# Altium PCB 5602_PCB_SHEET.PcbDoc (part 2 of 2)
Units mm, origin at the board's own origin, x right, y up, seen from the top; angles counter-clockwise.
Board outline 104.86 x 35.66 mm, 2 copper layers (Top Layer, Bottom Layer); 111 components, 84 nets, 367 pads, 137 vias.
Unrouted connection lines stored in the file: 5.
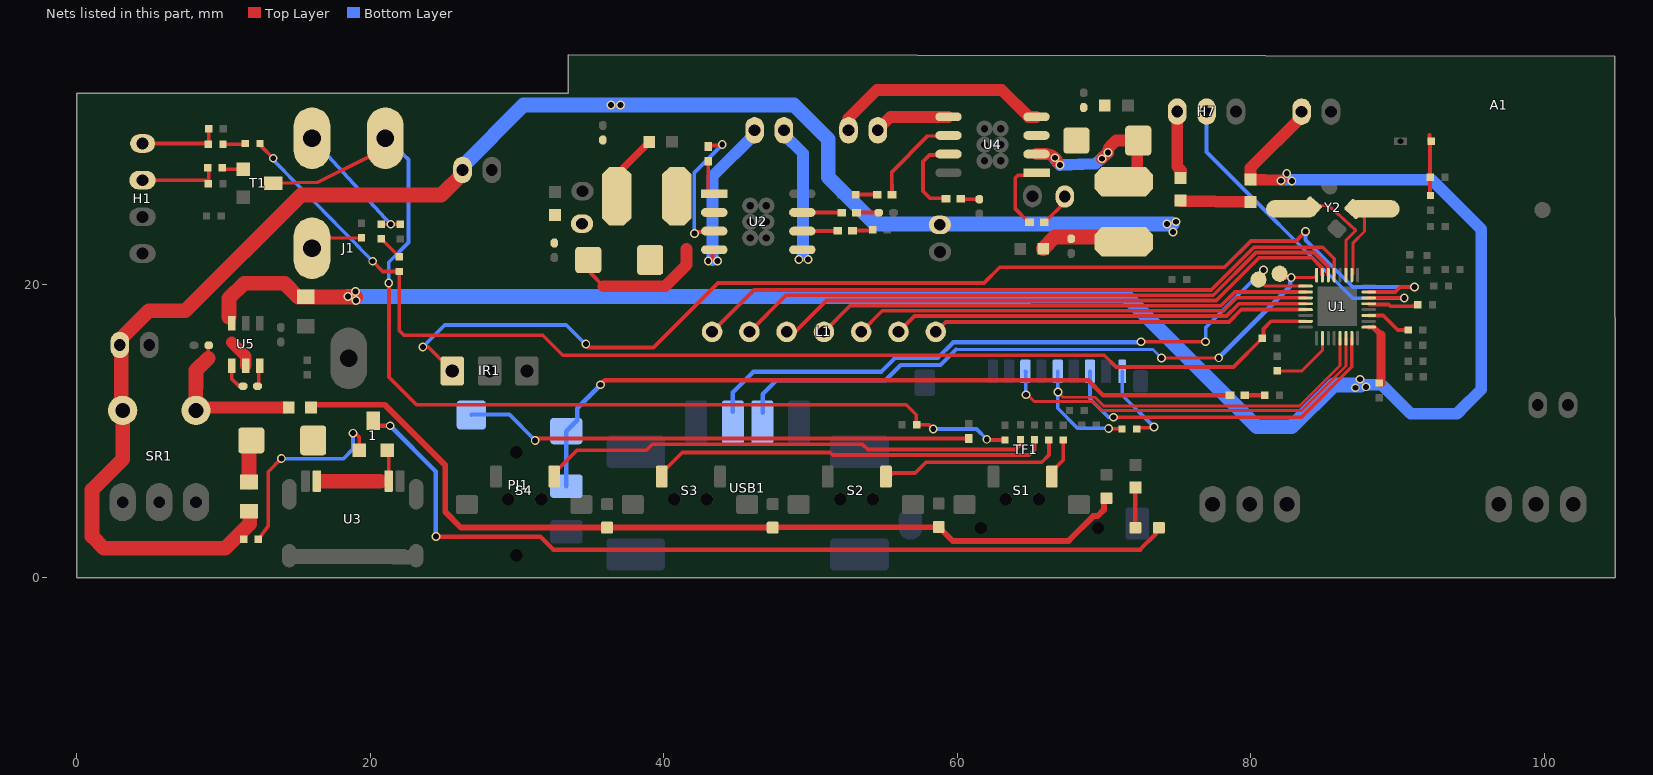
[diagram p2: the nets of this part, all layers, seen from the top]

## Via types
v1: diameter 0.6, hole 0.4, Top Layer to Bottom Layer, tented both sides, 131 vias
v2: diameter 0.4, hole 0.3, Top Layer to Bottom Layer, tented both sides, 6 vias

## Nets (pads, with @x,y where several pads share a name; then routed paths per layer and width w, separated by ;. In a path a pad name is that pad's centre, name@x,y a point inside that pad or via, vN(x,y) a via of type N, cw(c..) or ccw(c..) an arc to the next point about the centre after c; other vN are vias at no path point) (continued)
IR: IR1.1 U1.15 | length 80.2
  Top Layer w0.254: v1(23.595,15.73) 23.97,15.73 24.772,14.928 24.933,14.928 25.6,14.26 IR1.1@25.6,14.1 ; v1@34.622,15.962 34.887,15.698 39.315,15.698 43.708,20.091 61.838,20.091 62.913,21.165 78.23,21.165 80.017,22.953 83.093,22.953 v1(83.743,23.603) ; U1.15@88.044,19.482 89.854,19.482 90.192,19.821 v1(91.171,19.821)
  Bottom Layer w0.254: v1(23.595,15.73) 25.094,17.229 33.375,17.229 v1@34.752,15.852 ; v1(83.743,23.603) 83.743,23.034 86.956,19.821 v1(91.171,19.821)
  other v1: 34.703,15.944
LED1: L1.1 U1.21 | length 46.2
  Top Layer w0.254: L1.1@43.307,16.764 46.158,19.615 77.31,19.615 80.222,22.527 84.912,22.527 85.693,21.745 U1.21@85.693,20.632
LED2: L1.2 U1.22 | length 42.7
  Top Layer w0.254: L1.2@45.847,16.764 48.344,19.261 77.457,19.261 80.368,22.173 84.316,22.173 85.267,21.222 85.267,20.659 U1.22@85.294,20.632
LED3: L1.3 U1.23 | length 39.4
  Top Layer w0.254: L1.3@48.387,16.764 48.953,16.764 51.096,18.907 77.651,18.907 80.563,21.819 84.17,21.819 84.867,21.122 84.867,20.659 U1.23@84.894,20.632
LED4: L1.4 U1.26 | length 33.9
  Top Layer w0.254: L1.4@50.927,16.764 52.716,18.553 78.003,18.553 78.932,19.482 U1.26@83.744,19.482
LED5: L1.5 U1.27 | length 31.8
  Top Layer w0.2: L1.5@53.467,16.764 L1.5@54.021,16.764
  Top Layer w0.254: L1.5@53.467,16.764 54.902,18.199 78.15,18.199 79.033,19.082 U1.27@83.744,19.082
LED6: L1.6 U1.28 | length 28.5
  Top Layer w0.254: L1.6@56.007,16.764 57.088,17.845 78.366,17.845 79.203,18.682 U1.28@83.744,18.682
LED7: L1.7 U1.29 | length 25.8
  Top Layer w0.254: L1.7@58.547,16.764 59.22,17.437 78.521,17.437 79.367,18.282 U1.29@83.744,18.282
LED_SPI: H7.2 U1.14 | length 22.8
  Top Layer w0.254: U1.14@88.044,19.082 v1(90.47,19.082)
  Bottom Layer w0.254: H7.2@77.001,31.773 77.001,29.02 86.962,19.059 90.447,19.059 v1(90.47,19.082)
MIC: C11.2 R1.1 R5.1 U1.31 | length 81.7
  Top Layer w0.254: R5.1@12.5,29.6 ccw(c12.745,29.6) 12.572,29.427 v1(13.4,28.598) ; v1(20.177,21.576) 20.871,20.881 R1.1@21.994,20.881 21.994,16.854 22.318,16.529 31.771,16.529 33.128,15.172 70.022,15.172 70.83,14.364 78.829,14.364 C11.2@80.8,16.335 80.88,16.416 80.88,16.966 81.397,17.482 U1.31@83.744,17.482
  Bottom Layer w0.254: v1@13.408,28.59 13.379,28.59 13.335,28.547 13.341,28.541 v1@20.177,21.578
MUTE: R8.1 U1.13 | length 3.4
  Top Layer w0.254: U1.13@88.044,18.682 88.09,18.636 89.419,18.636 89.539,18.517 91.084,18.517 91.259,18.691 R8.1@91.293,18.691
Net1_1: 1.1 R27.2 | length 13.8
  Top Layer w0.254: R27.2@12.391,2.63 13.06,3.526 13.06,7.239 v1(13.954,8.132) ; v1@18.822,9.885 v1(18.843,9.863) 18.997,9.863 19.266,9.594 1.1@19.266,8.686
  Bottom Layer w0.254: v1(13.954,8.132) 13.97,8.116 18.185,8.116 18.843,8.775 v1(18.843,9.863)
Net1_2: 1.2 D3.2 U3.2 U3.3 | length 6.5
  Top Layer w0.254: D3.2@16.126,9.366 D3.2@16.37,9.122 ; 1.2@21.171,8.686 21.27,8.587 U3.3@21.27,6.595
  Top Layer w1: 16.694,6.595 20.694,6.595
Net1_3: 1.3 D1.1 | length 60.5
  Top Layer w0.254: 1.3@20.219,10.718 20.219,10.696 1.3@20.549,10.365
  Top Layer w0.3: 1.3@20.549,10.365 v1(21.371,10.365) ; v1(24.484,2.816) 31.595,2.816 32.481,1.93 72.468,1.93 73.552,3.014 73.552,3.218 D1.1@73.749,3.415
  Bottom Layer w0.3: v1(21.371,10.365) 24.484,7.252 v1(24.484,2.816)
NetA1_1: A1.1 C26.2 R34.2 | length 4
  Top Layer w0.254: A1.1@92.185,29.755 92.185,30.195 ; R34.2@92.216,26.053 A1.1@92.216,29.622
NetBR1_1: BR1.1 D2.2 U2.2 | length 1.2
  Top Layer w0.254: BR1.1@40.9,24.768 BR1.1@40.9,26.01
NetBR2_1: BR2.1 D4.2 U4.2 | length 12.2
  Top Layer w0.8: U4.2@65.415,28.879 66.051,28.879 cw(c66.051,28.014) v1(66.663,28.626) ; v1(66.663,28.626) 66.746,28.543 cw(c66.543,28.339) v1@66.83,28.339 ; v1(69.871,28.563) 70.284,28.976 v1(70.284,28.984) cw(c70.955,28.984) 70.48,29.459 70.789,29.767 cw(c70.865,29.691) 70.865,29.799 D4.2@72.344,29.799 72.268,29.723 72.268,27.868 71.395,26.995 BR2.1@71.358,26.995
  Bottom Layer w0.8: v1(66.663,28.626) ccw(c66.989,28.626) 66.758,28.395 v1(67.014,28.139) 69.444,28.215 69.849,28.586 v1(70.284,28.984)
NetC1_1: C1.1 R1.2 | length 1.7
  Top Layer w0.254: C1.1@20.756,23.103 R1.2@21.994,21.881
NetC1_2: C1.2 J1.1 R2.1 | length 9.3
  Top Layer w0.254: C1.2@20.756,24.103 20.873,24.103 21.406,24.101 R2.1@22.064,24.098
  Bottom Layer w0.254: J1.1@16.044,29.961 v1(21.406,24.095)
NetC2_2: C2.2 C3.2 H1.1 | length 5.5
  Top Layer w0.254: H1.1@4.5,29.6 8.87,29.6 cw(c8.87,29.45) C3.2@8.976,29.556 ccw(c8.918,29.614) 9,29.614 C2.2@9,30.6
NetC3_1: C3.1 R5.2 | length 1.6
  Top Layer w0.254: C3.1@9.976,29.556 11.5,29.556 R5.2@11.5,29.6
NetC4_2: C4.2 H1.2 R7.2 | length 5.6
  Top Layer w0.254: H1.2@4.5,27.1 C4.2@9,27.1 ; C4.2@8.976,26.856 ccw(c8.918,26.914) 9,26.914 C4.2@9,27.1 ; 9,27.108 C4.2@9,27.1 ; R7.2@9,27.9 C4.2@9,27.1
NetC6_1: C6.1 U1.2 | length 4.5
  Top Layer w0.2: C6.1@81.805,14.102 83.486,14.102 84.894,15.509 U1.2@84.894,16.332
NetC8_2: C8.2 R10.2 | length 1.4
  Top Layer w0.3: R10.2@79.597,12.442 C8.2@80.97,12.441
NetC10_2: C10.2 U1.11 | length 3.1
  Top Layer w0.254: U1.11@88.044,17.882 89.032,17.882 90.021,16.894 C10.2@90.73,16.894
NetC15_1: C15.1 R23.1 | length 1.3
  Top Layer w0.254: R23.1@53.136,24.891 53.148,24.902 54.45,24.902 C15.1@54.461,24.913
NetC16_1: C16.1 R25.1 | length 1.4
  Top Layer w0.254: R25.1@52.864,23.641 52.902,23.679 54.212,23.679 C16.1@54.25,23.717
NetC20_1: C20.1 R29.1 | length 1.3
  Top Layer w0.254: R29.1@60.255,25.833 R29.1@60.251,25.828 60.251,25.805 C20.1@61.512,25.805
NetC21_1: C21.1 R32.1 | length 1.5
  Top Layer w0.254: C21.1@53.083,26.1 53.083,26.117 R32.1@54.558,26.117
NetC24_1: C24.1 U5.4 | length 1.6
  Top Layer w0.254: U5.4@10.581,14.461 10.581,13.562 C24.1@11.062,13.082
NetC24_2: C24.2 U5.6 | length 1.5
  Top Layer w0.254: C24.2@12.336,13.068 12.409,13.141 12.409,14.389 U5.6@12.481,14.461
NetCAP1_2: CAP1.2 CAP2.2 CAP3.2 D2.1 R22.1 U2.3 | length 18
  Top Layer w0.254: 35.051,20.739 35.902,19.869 ; v1@42.098,23.369 v1(42.098,23.463) 42.192,23.463 42.293,23.564 43.39,23.564 U2.3@43.456,23.63 ; R22.1@43.049,29.388 43.122,29.461 43.93,29.461 v1(43.997,29.527)
  Top Layer w0.8: 35.902,19.869 40.1,19.869 41.567,21.335 41.567,22.419
  Bottom Layer w0.254: v1(42.098,23.463) 42.098,27.626 v1@44.007,29.535
NetCAP5_2: CAP5.2 CAP6.2 CAP7.2 D4.1 R28.1 U4.3 | length 3.2
  Top Layer w0.254: R28.1@65.933,24.235 65.978,24.235 67.343,25.601 CAP5.2@67.343,25.985 ; D4.1@67.523,29.193 D4.1@68.129,29.799
NetD1_2: D1.2 R21.2 | length 2.8
  Top Layer w0.254: R21.2@72.077,6.155 R21.2@72.148,6.083
  Top Layer w0.3: D1.2@72.148,3.415 R21.2@72.148,6.083
NetD3_1: D3.1 R26.2 | length 2.9
  Top Layer w0.254: D3.1@11.75,9.207 D3.1@11.91,9.366
  Top Layer w1: R26.2@11.75,6.534 D3.1@11.75,9.207
NetD5_1: D5.1 D6.1 D7.1 D8.1 R33.1 | length 61.6
  Top Layer w0.254: 67.582,2.521 67.655,2.594 ; D8.1@70,5.248 D8.1@70.181,5.429
  Top Layer w0.4: R33.1@15.982,11.602 16.179,11.799 20.995,11.799 25.121,7.673 25.121,4.501 26.196,3.425 D5.1@36.153,3.425 D6.1@47.436,3.425 47.46,3.449 58.729,3.449 D7.1@58.752,3.472 59.703,2.521 61.964,2.521 67.582,2.521 ; 67.655,2.594 69.267,4.206 69.568,4.206 70,4.639 D8.1@70,5.248
Neth2_1: h2.1 U2.4 | length 10.8
  Top Layer w0.254: v1@43.335,21.668 43.335,22.24 U2.4@43.456,22.36
  Bottom Layer w0.8: v1@43.335,21.668 43.335,27.37 46.2,30.235 h2.1@46.2,30.5
  other v1: 43.046,21.592 43.664,21.592
Neth2_2: h2.2 U2.5 | length 9.1
  Bottom Layer w0.8: h2.2@48.2,30.5 48.2,30.235 49.499,28.936 49.499,21.951
  other v1: 49.216,21.703 49.853,21.689
Neth3_1: h3.1 U4.4 | length 15.2
  Top Layer w0.8: h3.1@52.6,30.5 52.6,31.321 54.524,33.245 63.04,33.245 64.873,31.412 65.402,31.412 U4.4@65.4,31.41
Neth3_2: h3.2 U4.5 | length 5.2
  Top Layer w0.8: h3.2@54.6,30.5 54.6,30.554 55.463,31.417 55.471,31.41 U4.5@59.4,31.41
NetH7_3: H7.3 R39.1 | length 4.7
  Top Layer w0.254: 75.001,27.773 ccw(c75.746,27.773) R39.1@75.219,27.247
  Top Layer w0.8: H7.3@75.001,31.773 75.001,28.017 75.276,27.742
NetJ1_3: J1.3 R4.2 | length 3.6
  Top Layer w0.254: J1.3@16.044,22.461 17.099,23.15 R4.2@19.418,23.171
NetPJ1_1: PJ1.1 PJ1.2 R10.1 | length 51.3
  Top Layer w0.3: v1@35.702,13.165 35.997,13.46 68.928,13.46 69.946,12.442 R10.1@78.597,12.442
  Bottom Layer w0.3: PJ1.1@33.373,6.251 PJ1.2@33.373,10.001 34.121,10.749 34.121,11.568 v1(35.71,13.157)
NetPJ1_3: PJ1.3 R12.1 | length 34.8
  Top Layer w0.254: v1(31.25,9.372) 31.379,9.501 47.013,9.501 60.807,9.501 R12.1@60.869,9.439
  Bottom Layer w0.254: PJ1.3@26.9,11.1 26.9,11.128 29.493,11.128 v1(31.25,9.372)
NetR7_1: R7.1 T1.1 | length 1.4
  Top Layer w0.254: R7.1@10,27.9 10,27.852 T1.1@11.367,27.852
NetR14_2: R14.2 S1.1 | length 2.8
  Top Layer w0.254: S1.1@66.45,6.9 66.45,7.25 67.238,8.038 R14.2@67.238,9.393
NetR15_1: R15.1 S2.1 | length 13.1
  Top Layer w0.254: S2.1@55.15,6.9 55.15,6.662 55.63,7.141 57.15,7.141 57.885,7.877 65.765,7.877 66.255,8.367 R15.1@66.255,9.399
NetR18_1: R18.1 S3.2 | length 26.9
  Top Layer w0.254: S3.2@39.895,7.16 41.276,8.541 51.361,8.541 51.535,8.367 64.91,8.367 65.278,8.735 R18.1@65.278,9.415
NetR19_1: R19.1 S4.1 | length 33.5
  Top Layer w0.254: S4.1@32.55,6.9 32.55,7.15 34.097,8.697 38.829,8.697 39.231,9.099 53.56,9.099 53.908,8.751 63.998,8.751 64.317,9.069 R19.1@64.317,9.428
NetR22_2: R22.2 U2.1 | length 3.1
  Top Layer w0.254: U2.1@42.765,26.343 42.938,26.17 U2.1@43.222,26.17 ; R22.2@43.049,28.388 43.049,26.343 U2.1@43.222,26.17 ; U2.1@43.456,26.17 U2.1@43.222,26.17
NetR23_2: R23.2 U2.7 | length 2.7
  Top Layer w0.254: U2.7@49.456,24.9 49.46,24.896 52.132,24.896 R23.2@52.136,24.891
NetR25_2: R25.2 U2.6 | length 2.4
  Top Layer w0.254: U2.6@49.456,23.63 49.461,23.636 51.858,23.636 R25.2@51.864,23.641
NetR28_2: R28.2 U4.1 | length 5
  Top Layer w0.254: R28.2@64.932,24.235 64.887,24.235 63.955,25.168 63.955,27.235 64.156,27.436 65.242,27.436 U4.1@65.415,27.609
NetR29_2: R29.2 U4.7 | length 5.7
  Top Layer w0.254: R29.2@59.251,25.828 59.219,25.861 58.163,25.861 57.683,26.341 57.683,28.382 58.119,28.819 59.349,28.819 U4.7@59.4,28.87
NetR32_2: R32.2 U4.6 | length 6.4
  Top Layer w0.254: R32.2@55.558,26.117 55.555,27.657 57.988,30.102 U4.6@59.415,30.149
NetR38_1: R38.1 R39.2 | length 4.8
  Top Layer w0.8: R39.2@75.219,25.69 R38.1@79.988,25.619
PWR: BR1.2 BR2.2 C12.2 C13.2 C17.2 C18.2 CAP4.1 h4.1 h5.1 R26.1 R27.1 SR1.1 | length 121.3
  Top Layer w0.254: BR1.2@36.8,26.01 37.247,26.457 BR1.2@37.247,27.932 ; C12.2@38.855,29.862 C12.2@39.016,29.701 C12.2@39.053,29.737 ; BR2.2@71.017,23.236 71.019,23.233 BR2.2@71.358,22.895
  Top Layer w0.5: BR1.2@37.247,27.932 C12.2@39.016,29.701
  Top Layer w1: R26.1@11.794,4.534 11.794,3.683 10.136,2.025 1.858,2.025 1.058,2.824 1.058,6.016 3.14,8.097 SR1.1@3.14,11.412 3.047,11.505 3.047,15.782 h5.1@2.953,15.875 2.953,16.218 4.928,18.193 7.414,18.193 15.312,26.09 24.855,26.09 26.3,27.535 h4.1@26.3,27.8 ; C17.2@65.867,22.432 66.668,23.233 BR2.2@71.019,23.233
  Bottom Layer w1: h4.1@26.3,27.8 26.3,28.065 30.454,32.219 36.426,32.219 37.074,32.219 48.891,32.219 51.211,29.899 51.211,27.294 54.35,24.155 54.614,24.155 54.659,24.11 58.288,24.11 58.825,24.11 74.644,24.11
  other v1: 74.714,23.571 74.299,24.119 74.909,24.269 36.426,32.216 37.074,32.227
R4: J1.2 R3.2 R20.1 T1.3 | length 68.5
  Top Layer w0.254: T1.3@13.4,26.9 16.438,26.965 19.853,28.65 ; v1(21.271,20.096) 21.271,19.98 21.298,19.953 21.298,13.678 23.174,11.802 56.535,11.802 57.224,11.113 57.224,10.463 R3.2@57.243,10.444 58.074,10.444 v1(58.377,10.141) ; v1(62.019,9.442) 62.059,9.401 R20.1@63.266,9.401
  Bottom Layer w0.254: J1.2@21.044,29.961 22.615,28.499 22.615,22.85 21.271,21.506 v1(21.271,20.096) ; v1(58.377,10.141) 61.32,10.141 v1(62.019,9.442)
SD-CLK: R17.2 TF1.5 U1.5 | length 29.9
  Top Layer w0.2: v1(66.868,12.66) 67.217,12.312 69.393,12.312 69.994,11.71 83.337,11.71 86.094,14.467 U1.5@86.094,16.332
  Top Layer w0.254: v1(70.327,10.19) 70.348,10.17 71.213,10.17 R17.2@71.233,10.149
  Bottom Layer w0.254: TF1.5@66.852,14.068 66.852,12.66 66.852,11.561 68.224,10.19 v1@70.125,10.19
SD-CMD: TF1.3 U1.6 | length 27
  Top Layer w0.2: v1(64.687,12.479) 64.795,12.479 65.263,12.012 69.253,12.012 69.854,11.411 83.461,11.411 86.494,14.443 U1.6@86.494,16.332
  Bottom Layer w0.254: TF1.3@64.652,14.068 64.689,14.031 64.687,14.028 v1(64.687,12.479)
SD-DAT: TF1.7 U1.7 | length 23.6
  Top Layer w0.254: v1(70.664,10.951) 83.464,10.951 86.894,14.381 U1.7@86.894,16.332
  Bottom Layer w0.254: TF1.7@69.052,14.068 69.052,12.207 70.308,10.951 v1(70.664,10.951)
SD-DET: R17.1 TF1.9 | length 5.9
  Top Layer w0.254: R17.1@72.233,10.149 72.307,10.223 73.347,10.223 v1(73.413,10.29)
  Bottom Layer w0.254: TF1.9@71.252,14.068 71.252,12.454 71.25,12.452 v1(73.413,10.29)
SOCI: U1.18 Y1.1 Y2.1 | length 5.3
  Top Layer w0.2: U1.18@86.894,20.632 86.963,20.702 86.963,22.808 87.761,23.606 87.761,24.513 Y1.1@87.615,24.659 ; Y1.1@88.4,25.148 88.438,25.148 Y1.1@88.9,24.686
  Top Layer w0.254: Y2.1@86.894,25.132 Y2.1@87.074,25.132
SOCO: U1.19 Y1.2 Y2.3 | length 7.1
  Top Layer w0.2: Y2.3@84.219,25.256 Y2.3@84.16,25.315 85.331,25.364 87.162,23.68 86.494,23.011 U1.19@86.494,20.632
USB-DM: pad.1@81.979,20.725 U1.24 USB1.3 | length 44.1
  Top Layer w0.2: v1(73.931,14.985) 77.817,14.985 v1(77.827,14.996) ; v1(82.766,20.471) 84.332,20.471 U1.24@84.494,20.632
  Top Layer w0.3: pad.1@81.979,20.725 82.233,20.471 v1(82.766,20.471)
  Bottom Layer w0.2: 59.928,15.566 73.351,15.566 v1(73.931,14.985)
  Bottom Layer w0.3: USB1.3@46.745,11.256 46.745,12.52 47.696,13.471 55.129,13.471 56.162,14.505 58.868,14.505 59.928,15.566 ; v1(77.827,14.996) 82.709,19.877 82.709,20.413 v1(82.766,20.471)
USB-DP: pad.1@80.531,20.318 U1.25 USB1.2 | length 45.7
  Top Layer w0.2: pad.1@80.531,20.318 80.967,19.882 U1.25@83.744,19.882
  Top Layer w0.254: v1(72.527,16.089) v1(76.934,16.089)
  Top Layer w0.3: pad.1@80.531,20.318 80.531,20.547 v1@80.938,20.953
  Bottom Layer w0.254: v1(76.934,16.089) 76.934,17.039 v1(80.885,20.99)
  Bottom Layer w0.3: USB1.2@44.723,11.327 44.723,12.653 46.107,14.038 54.821,14.038 55.765,14.982 58.67,14.982 59.734,16.047 72.485,16.047 v1(72.527,16.089)
VBAT: C7.1 C22.2 h6.1 R31.2 R33.2 R38.2 SR1.2 U1.9 U5.1 U5.5 | length 147.2
  Top Layer w0.254: 8.969,14.974 8.969,15.806 C22.2@9.007,15.844 ; h6.1@83.473,31.416 h6.1@83.473,31.768
  Top Layer w0.3: U1.9@88.044,17.082 U1.9@88.369,17.082
  Top Layer w0.4: U1.9@88.369,17.082 88.892,16.559
  Top Layer w0.6: C7.1@88.892,13.284 88.892,16.559
  Top Layer w0.8: SR1.2@8.118,11.612 R33.2@14.246,11.612 ; 10.581,16.051 11.526,15.107 U5.5@11.526,14.466 ; v1@82.078,27.101 R38.2@79.988,27.143 79.988,27.931 h6.1@83.473,31.416 ; h6.1@83.505,31.768 h6.1@83.505,31.824
  Top Layer w1: SR1.2@8.118,11.612 8.14,14.145 8.969,14.974 ; U5.1@10.387,17.769 10.387,19.043 11.421,20.077 14.17,20.077 15.112,19.135 18.503,19.135 v1@19.032,19.135
  Top Layer w1.2: SR1.2@8.118,11.612 SR1.2@8.119,11.433
  Bottom Layer w0.8: v1@82.293,27.138 92.34,27.138 95.723,23.755 95.723,12.839 94.26,11.375 94.065,11.181 90.917,11.181 88.933,13.165 87.356,13.165
  Bottom Layer w1: v1(18.503,19.178) 64.865,19.178 64.884,19.197 71.485,19.197 ; 69.962,19.208 71.512,19.208 80.425,10.295 82.812,10.295 85.66,13.144 87.504,13.144
  other v1: 87.134,12.957 87.858,13.019 87.458,13.532 19.032,18.895 19.011,19.507 82.077,27.062 82.809,27.049 82.463,27.554
pads on no net: A1. A1.2 C26.1 PJ1.0 S1.0 S1.3 S1.4 S2.0 S2.3 S2.4 S3.0 S3.3 S3.4 S4.0 S4.3 S4.4 SW1.1 SW2.1 TF1.0 TF1.1 TF1.2 TF1.8 U1.0 U2.0 U3.4 U3.5 U3.6 U3.7 U3.9 U3.10 U3.11 U4.0
copper on no net: | length 0.4
  Bottom Layer w0.254: 20.728,29.645 21.044,29.961
  other v1: 77.366,1.728
  other v2: 85.734,17.462 84.887,17.469 85.314,17.476 85.328,17.945 84.866,17.98 84.866,18.414

## Polygon pours and split planes (outlines as drawn)
GND on Top Layer "Top Layer-No Net" (solid, remove dead copper, pour order 69): 0,0 104.86,0 104.809,35.557 33.507,35.661 33.507,33.037 0,33.037
GND on Bottom Layer "Top Layer-No Net1" (solid, remove dead copper, pour order 71): 0,0 104.86,0 104.809,35.557 33.507,35.661 33.507,33.037 0,33.037

## Keep-outs
Keep-Out Layer:
  lines w0.127: 0,0.035 104.8,0.035 104.8,35.634 33.5,35.634 33.5,33.035 0,33.035 0,0.035

## Other copper
Top Layer:
  rectangle net VBAT: 81.694,26.735 83.128,27.661
  rectangle net PWR: 37.53,28.731 38.351,29.878
  rectangle net PWR: 36.877,27.937 37.714,29.824
  rectangle net PWR: 36.936,29.9 37.49,31.733
  rectangle net PWR: 35.994,31.72 37.492,32.716
  rectangle net VBAT: 17.942,18.59 19.748,19.813
  rectangle net PWR: 73.059,23.139 75.249,24.61
  region net Neth2_2: 48.711,22.558 49.869,22.558 cw(c49.869,22.105) 50.323,22.105 50.323,21.708 cw(c49.847,21.708) 49.847,21.233 49.086,21.233 cw(c49.086,21.63) 48.689,21.63 48.689,22.316 cw(c48.983,22.316) 48.983,22.61
  region: 70.583,5.222 70.583,4.946 cw(c70.152,4.946) 70.152,4.514 cw(c70.152,4.893) 69.773,4.893 69.773,5.246
  region net Neth2_1: 42.668,22.461 43.826,22.461 cw(c43.826,22.008) 44.28,22.008 44.28,21.611 cw(c43.805,21.611) 43.805,21.136 43.043,21.136 cw(c43.043,21.532) 42.647,21.532 42.647,22.218 cw(c42.941,22.218) 42.941,22.513
  region net 5V: 11.791,19.219 cw(c11.882,19.127) 11.882,19.256 12.935,19.256 cw(c12.935,19.118) 13.033,19.216 13.036,19.213 13.036,17.658 16.211,17.658 16.211,16.783 12.11,16.783 12.11,18.139 11.956,18.293 11.737,18.293 cw(c11.737,18.317) 11.713,18.317 11.713,19.167 cw(c11.804,19.167) 11.804,19.259 11.899,19.259
  region net NetR28_2: 64.487,24.467 64.543,24.411 cw(c64.326,24.195) 64.633,24.195 cw(c64.828,24.195) 64.69,24.333 64.846,24.489 ccw(c64.703,24.489) 64.703,24.632 64.665,24.632 64.811,24.486 64.843,24.486 64.844,24.487
  region net NetCAP5_2: 70.659,31.809 ccw(c70.894,31.574) 70.562,31.574 70.562,31.45 ccw(c70.562,30.817) 70.115,31.264 69.945,31.095 cw(c70.268,31.417) 69.811,31.417 69.811,31.598 ccw(c69.811,32.348) 70.341,31.818 70.403,31.879 ccw(c70.572,32.048) 70.572,31.809 70.659,31.809
  region net NetCAP5_2: 64.916,30.367 ccw(c65.17,30.113) 64.811,30.113 64.811,29.854 ccw(c64.908,29.854) 64.839,29.785 64.849,29.776 ccw(c64.901,29.828) 64.901,29.754 66.96,29.754 cw(c66.96,29.506) 67.135,29.681 cw(c66.954,29.499) 67.211,29.499 67.522,27.821 cw(c65.616,27.989) 66.844,26.522 67.875,26.452 67.827,26.638 cw(c68.275,26.755) 67.875,26.989 68.417,28.065 cw(c68.702,28.754) 68.013,28.469 cw(c68.298,28.351) 68.18,28.636 68.934,28.833 68.934,29.506 cw(c71.356,29.08) 69.945,31.095 69.848,31.473 cw(c70.659,30.662) 70.659,31.809 70.659,32.285 ccw(c70.07,32.288) 70.484,32.706 cw(c70.407,33.018) 70.407,32.697 69.795,32.697 ccw(c69.732,31.839) 69.136,32.459 68.215,32.459 68.078,32.213 cw(c65.729,32.212) 67.389,30.551 cw(c67.311,30.628) 67.311,30.518 64.884,30.459 64.884,30.35 ccw(c64.985,30.349) 64.913,30.278
  region net NetCAP1_2: 42.577,23.935 43.054,23.935 cw(c43.054,23.817) 43.173,23.817 43.173,23.579 cw(c42.838,23.579) 42.838,23.244
  region net NetCAP1_2: 41.178,22.464 cw(c42.649,22.464) 42.649,23.935 42.822,23.935 cw(c42.822,23.827) 42.93,23.827 42.93,23.336 cw(c42.838,23.336) 42.838,23.244 42.533,23.244 ccw(c42.533,22.677) 41.966,22.677 41.966,22.275 cw(c41.928,22.275) 41.928,22.237 41.17,22.237
  region net NetCAP1_2: 34.085,20.879 35.713,20.944 35.713,20.509 ccw(c36.215,20.509) 36.215,20.007 cw(c36.215,19.964) 36.258,19.964 36.258,19.594 ccw(c36.139,19.594) 36.139,19.713 35.713,19.505 cw(c35.572,21.073) 34.004,20.933
  region net NetCAP1_2: 31.755,25.329 34.041,25.329 cw(c34.041,23.365) 35.429,24.754 cw(c35.149,24.473) 35.545,24.473 35.545,23.028 ccw(c36.541,23.028) 35.837,22.324 35.829,22.316 35.829,21.792 34.084,21.792 cw(c34.084,21.967) 33.961,21.843 ccw(c33.837,21.967) 34.012,21.967 34.012,22.41 32.09,22.41 cw(c32.09,22.862) 31.771,22.542 31.771,24.754
  region net NetBR1_1: 41.901,24.602 41.467,24.168 ccw(c41.623,24.011) 41.402,24.011 ccw(c41.402,23.47) 41.019,23.853 40.627,23.46 ccw(c42.146,21.942) 39.998,21.942 39.998,21.821 38.718,21.821 cw(c38.718,22.135) 38.497,21.913 39.154,22.571 ccw(c37.358,24.367) 39.898,24.367 39.898,24.548
  region net NetBR1_1: 43.81,24.932 ccw(c43.158,24.28) 43.158,25.202 41.413,25.202 41.413,24.822 ccw(c41.634,24.822) 41.477,24.665 ccw(c41.622,24.81) 41.622,24.605 43.57,24.605 ccw(c43.57,24.794) 43.704,24.66 43.853,24.81
  region net PWR: 35.764,30.051 39.255,30.097 cw(c38.864,29.706) 39.417,29.706 39.417,29.508 39.381,29.472 cw(c38.966,29.887) 38.966,29.3 37.967,28.307 37.784,27.389 36.909,28.01 37.984,29.211 38.111,29.389 38.202,29.506 38.221,29.592 ccw(c37.915,29.286) 37.915,29.719 35.743,29.719
  region net NetC24_1: 16.375,11.426 16.375,11.467 cw(c16.508,11.467) 16.508,11.599 16.384,11.599 cw(c16.384,11.626) 16.357,11.626 16.357,11.47 ccw(c16.378,11.47) 16.378,11.448
  region net Net1_2: 21.381,8.038 21.149,8.038 21.149,8.149 ccw(c21.063,8.149) 21.063,8.235 21.427,8.235 ccw(c21.538,8.124) 21.381,8.124 21.381,8.046
  region net Net1_2: 20.993,7.293 cw(c20.787,7.293) 20.787,7.087 20.417,7.087 ccw(c20.417,7.066) 20.396,7.066 20.396,6.099 cw(c20.431,6.099) 20.431,6.134 20.804,6.134 cw(c20.804,5.967) 20.971,5.967 20.971,7.223 cw(c20.995,7.223) 20.995,7.247 20.993,7.247
  region net Net1_2: 15.236,9.112 15.236,8.594 ccw(c15.479,8.594) 15.479,8.351 cw(c15.479,7.76) 16.07,7.76 16.07,6.944 ccw(c16.197,6.944) 16.197,6.817 17.566,6.817 cw(c17.566,7.657) 16.726,7.657 16.726,8.243 cw(c16.805,8.243) 16.805,8.321 16.932,8.321 ccw(c16.932,8.491) 17.102,8.491 17.102,9.153 15.233,9.153
  region net NetD3_1: 12.793,8.686 cw(c12.593,8.686) 12.593,8.486 12.527,8.42 ccw(c13.195,7.752) 12.25,7.752 11.262,7.752 11.262,8.783 12.793,8.783
  region net Net1_1: 12.691,3.274 12.439,2.929 cw(c12.328,3.04) 12.328,2.884 12.639,2.573 12.639,2.671 cw(c12.897,2.671) 12.714,2.854 12.922,3.129
  region net VBAT: 7.484,12.177 ccw(c7.132,12.529) 7.63,12.529 7.63,13.306 8.629,13.306 8.629,12.45 8.621,12.45 8.621,12.409 ccw(c8.845,12.409) 8.845,12.185
  region net VBAT: 8.942,12.004 9.617,12.004 9.644,11.977 9.644,11.216 ccw(c9.644,10.492) 9.133,11.004 8.945,10.816
  region net NetC2_2: 8.5,29.722
  region net VBAT: 87.456,13.894 86.773,13.211 86.773,12.515 87.866,12.515 88.398,13.046 88.398,12.973 89.319,12.973 89.413,13.068 89.413,13.945
  region net AD2: 84.194,17.075 83.236,17.075 83.063,16.902 83.068,16.897 83.068,16.443 82.644,16.019 83.101,15.563 83.209,15.563 84.137,16.492 84.137,16.988 84.205,17.056
  region: 83.157,15.827
  region: 18.025,19.75
  region net PWR: 73.351,22.41 74.08,23.139 74.093,23.139 73.343,23.89
  region net NetCAP5_2: 65.918,24.492 66.18,24.616 66.347,24.432 66.231,24.216 65.933,24.235
  region net NetR28_2: 64.665,24.632 64.765,24.632 64.911,24.487 64.91,24.486 64.811,24.486
  region net NetR28_2: 64.804,24.59
  region net NetR28_2: 64.665,24.477 64.738,24.55 64.738,24.559
  region: 64.284,27.089
  region net NetR28_2: 64.156,27.436 64.438,27.718 64.525,27.718 64.525,27.335 64.424,27.436
  region net NetBR2_1: 73.132,28.841
  region net NetBR2_1: 71.58,28.841 73.132,28.841 72.849,28.558 72.849,27.851 72.862,27.837 72.822,27.797 71.545,27.797 71.545,27.98 71.753,28.188 71.739,28.202 71.739,28.685 71.491,28.933 71.496,28.939 73.113,28.939
  region net NetCAP5_2: 68.417,28.065 68.934,28.833 67.843,28.747 67.837,28.048
  region: 42.679,24.089
  region net NetCAP1_2: 42.698,23.922
  region: 33.973,19.707
  region: 51.827,10.994
  region net 5V: 50.768,11.362 51.273,11.356 51.535,11.232 51.532,10.843
  region net 5V: 50.768,11.362
  region net 5V: 49.793,11.235 49.796,11.232 51.535,11.232 51.535,9.925 51.492,9.882 49.802,9.882 49.802,11.191 49.758,11.235
  region: 17.879,8.497
  region net Net1_1: 12.589,3.12
  region: 12.698,3.27
  region: 12.328,2.884
  region: 2.022,12.718
  region net VBAT: 9.007,15.844 9.012,14.666 9.364,14.666 10.009,15.312 9.477,15.844
  region net VBAT: 10.163,17.725 10.195,17.758 10.862,17.758 10.862,16.165 10.009,15.312 8.986,15.312 8.986,17.283 9.42,17.717
Bottom Layer:
  rectangle net VBAT: 86.748,12.447 88.169,13.816
  rectangle net VBAT: 81.635,26.752 83.101,27.661
  rectangle net VBAT: 17.942,18.579 19.75,19.813
  region net CTR: 80.132,23.971 ccw(c79.891,24.17) 80.204,24.17 80.204,24.219 80.312,24.119
  region net CTR: 80.287,23.774 cw(c80.522,23.539) 80.522,23.871 80.552,23.871 80.552,23.919 ccw(c80.258,23.919) 80.466,24.127
  region net Neth2_2: 48.819,22.558 49.869,22.558 cw(c49.869,22.105) 50.323,22.105 50.323,21.708 cw(c49.847,21.708) 49.847,21.233 49.086,21.233 cw(c49.086,21.63) 48.689,21.63 48.689,22.316 cw(c48.9,22.359)
  region net Neth2_1: 42.802,22.461 43.826,22.461 cw(c43.826,22.008) 44.28,22.008 44.28,21.611 cw(c43.805,21.611) 43.805,21.136 43.043,21.136 cw(c43.043,21.532) 42.647,21.532 42.646,22.151 cw(c42.879,22.228)
  region net 5V: 11.266,20.493 cw(c10.005,19.225) 11.793,19.225 11.793,18.6 ccw(c11.925,18.6) 11.925,18.467 12.946,18.467 ccw(c12.946,18.554) 13.032,18.554 13.032,19.445 ccw(c11.958,19.464) 11.884,20.536
  region: 81.656,27.756
  region net CTR: 80.104,23.948
  region: 80.052,24.076
  region: 80.052,24.076
  region net CTR: 80.195,24.219
  region net CTR: 80.32,23.971
  region net CTR: 80.552,23.871
  region net CTR: 80.195,24.219
  region net CTR: 80.155,24.316
  region net PWR: 57.286,24.605
  region: 73.34,21.63
  region: 73.667,22.272
  region net PWR: 73.354,22.405 74.075,23.126 74.075,23.155 75.219,23.155 75.225,23.15 75.238,23.163 75.238,24.635 72.665,24.635 72.643,24.613 72.757,24.5 72.757,22.974
  region: 44.067,22.38
  region: 42.83,21.476
  region net 5V: 49.793,11.364 51.538,11.367 51.457,10.203 49.802,9.874 49.783,11.354
  region: 11.218,19.645
  region net 5V: 11.318,20.42
  region: 11.432,19.567

## Silkscreen, mask and mechanical layers (free items; w line width, h text height)
Top Overlay:
  text "GND" at 100.737,25.496 h0.5